# Altium PCB AIRZAI_LED_STRIP_FLEX_REVA_7p5Pitch.PcbDoc
Units mil, origin at the board's own origin, x right, y up, seen from the top; angles counter-clockwise.
Board outline 6727.47 x 711.99 mil, 2 copper layers (Top Layer, Bottom Layer); 45 components, 44 nets, 220 pads, 46 vias.
Unrouted connection lines stored in the file: 63.
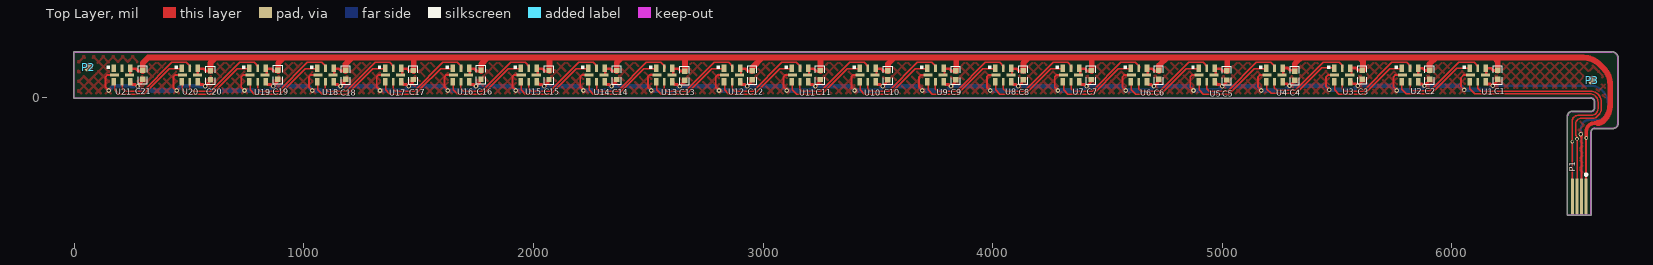
[diagram p0: Top Layer view]
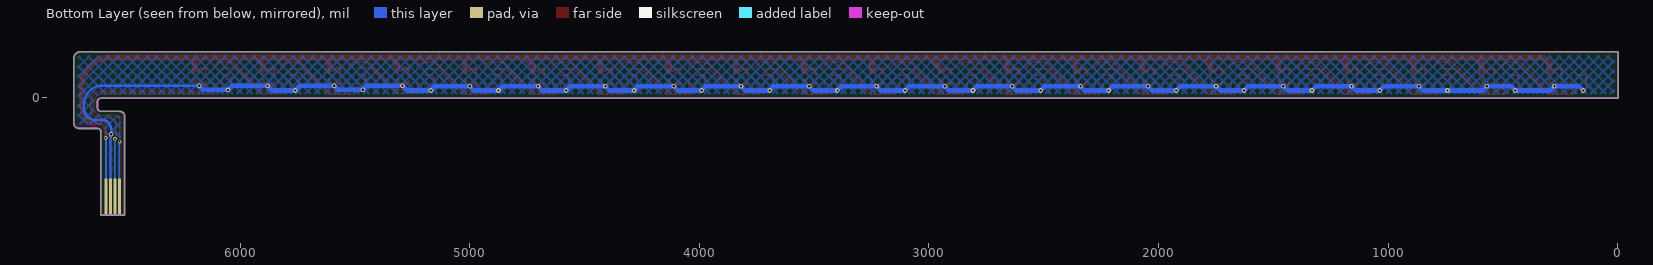
[diagram p1: Bottom Layer view, seen from below]

## Layer stack, top to bottom
Top Solder: solder mask 0.4, Solder Resist, Dk 3.5
Top Layer: signal copper 1.4
Dielectric 1: dielectric 12.6, FR-4, Dk 4.8
Bottom Layer: signal copper 1.4
Bottom Solder: solder mask 0.4, Solder Resist, Dk 3.5

## Board outline
6503.5,-510.11 ccw(c6506.02,-510.11) 6506.02,-512.63 6604.44,-512.63 ccw(c6604.44,-510.11) 6606.96,-510.11 6606.96,-152 ccw(c6604.44,-152) 6606.95,-151.79 cw(c6622.38,-150.62) 6621.1,-135.2 6702.76,-135.2 ccw(c6702.76,-113) 6724.96,-113 ccw(c6722.44,-113) 6723.97,-111 ccw(c6722.44,-109) 6724.96,-109 6724.96,171.81 ccw(c6697.4,171.81) 6697.4,199.37 0,199.37 ccw(c0,196.85) -2.52,196.85 -2.52,0 ccw(c0,0) 0,-2.52 6604.33,-2.51 ccw(c6604.33,0) 6604.33,-2.51 cw(c6604.33,-19.68) 6621.5,-19.68 6621.5,-43 cw(c6604.33,-43) 6604.33,-60.17 6524.02,-60.17 cw(c6523.67,-80.34) 6524.05,-60.17 6524.02,-60.17 ccw(c6523.67,-80.34) 6503.5,-79.95 ccw(c6506.02,-80) 6503.5,-80
board region "Layer Stack Region 1": 6606.95,-294 6606.96,-510.11 6606.96,-510.61 6606.57,-511.54 6605.87,-512.24 6604.94,-512.63 6604.44,-512.63 6506.02,-512.63 6505.52,-512.63 6504.59,-512.24 6503.88,-511.54 6503.5,-510.61 6503.5,-510.11 6503.5,-294
board region "Layer Stack Region 1": 6368,199.37 6697.4,199.37 6700.12,199.37 6705.44,198.31 6710.45,196.23 6714.97,193.21 6718.8,189.38 6721.82,184.86 6723.9,179.85 6724.96,174.52 6724.96,171.81 6724.96,-109 6724.82,-109.86 6724.57,-110.38 6723.97,-111 6724.57,-111.62 6724.82,-112.14 6724.96,-112.71 6724.96,-117.42 6721.58,-125.58 6715.33,-131.82 6707.17,-135.2 6702.76,-135.2 6621.1,-135.2 6618.13,-135.74 6612.78,-138.48 6608.88,-143.06 6607.01,-148.77 6606.95,-151.79 6606.95,-230 6503.5,-230.01 6503.5,-80 6503.58,-75.95 6506.78,-68.6 6512.55,-63.03 6520.01,-60.1 6524.02,-60.17 6604.33,-60.17 6607.68,-59.84 6613.87,-57.28 6618.61,-52.54 6621.17,-46.35 6621.5,-43 6621.5,-19.69 6621.17,-16.34 6618.61,-10.15 6613.87,-5.41 6607.68,-2.85 6604.33,-2.52 6368,-2.52
board region "Layer Stack Region 1": 6503.5,-294 6503.5,-230.01 6606.95,-230 6606.95,-294
board region "Layer Stack Region 1": 6289,-2.52 0,-2.52 -0.5,-2.52 -1.42,-2.13 -2.13,-1.43 -2.52,-0.5 -2.52,0 -2.52,196.85 -2.52,197.35 -2.13,198.28 -1.42,198.98 -0.5,199.37 0,199.37 6289,199.37
board region "Layer Stack Region 3": 6368,-2.52 6289,-2.52 6289,199.37 6368,199.37

## Design rules (kind name [scope] priority, off if disabled: settings)
Clearance Clearance_Fudicial [HasFootprint('Fudicial') vs (InNet('GND') AND InPolygon)] p1: gap=19.68 ignorepadtopadclearanceinfootprint=FALSE
Clearance Clearance_polygon_5V [OnLayer('Keep-Out Layer') vs (InNet('+5V') AND InPolygon)] p2: gap=10 ignorepadtopadclearanceinfootprint=FALSE
Clearance Clearance_POLYGON_KEEPOUT [(OnLayer('Keep-Out Layer')) vs (InNet('GND') AND InPolygon)] p3: gap=10 ignorepadtopadclearanceinfootprint=FALSE
Clearance [All] p4: gap=6 ignorepadtopadclearanceinfootprint=FALSE
MinimumSolderMaskSliver [All] p1: minsoldermaskwidth=1
PolygonConnect [All] p1: connectstyle=Direct reliefconductorwidth=10 reliefentries=4 polygonreliefangle="90 Angle" airgapwidth=10
RoomDefinition AIRZAI_LED_STRIP_FLEX_REVA_7p5Pitch [InComponentClass('AIRZAI_LED_STRIP_FLEX_REVA_7p5Pitch')] p1: confinementstyle=ConfineIn formatcopy=TRUE lockcomponents=FALSE outline -3699.89,-5126.44 10960.11,-5126.44 10960.11,4473.56 -3699.89,4473.56
RoutingVias [All] p1: holewidth=28 width=50 viastyle="Through Hole" minholewidth=8 minwidth=16 maxholewidth=28 maxwidth=50
SilkToSilkClearance [All] p1: silktosilkclearance=1
SilkToSolderMaskClearance [IsPad] p1: minsilkscreentomaskgap=2 clearancetoexposedcopper=TRUE
SolderMaskExpansion [All] p1: expansion=4
UnRoutedNet [All] p1: checkbadconnections=TRUE
Width [All] p1: maxlimit=100 minlimit=6 preferedwidth=10
26 further rules are at their usual default settings.

## Components (designator, comment, footprint, x,y, rotation, side; value= is the part's Value field where it differs from the comment)
C1 "0.1µF" 0402CAP 6200.25,98.43 r270 top
C2 "0.1µF" 0402CAP 5903.14,98.43 r270 top
C3 "0.1µF" 0402CAP 5609.7,99.11 r270 top
C4 "0.1µF" 0402CAP 5315.92,95.43 r270 top
C5 "0.1µF" 0402CAP 5020.25,96.11 r270 top
C6 "0.1µF" 0402CAP 4723.87,98.43 r270 top
C7 "0.1µF" 0402CAP 4428.6,98.11 r270 top
C8 "0.1µF" 0402CAP 4133.32,97.46 r270 top
C9 "0.1µF" 0402CAP 3839.05,96.93 r270 top
C10 "0.1µF" 0402CAP 3543.77,97.11 r270 top
C11 "0.1µF" 0402CAP 3248.17,98.11 r270 top
C12 "0.1µF" 0402CAP 2953.22,97.61 r270 top
C13 "0.1µF" 0402CAP 2657.94,95.42 r270 top
C14 "0.1µF" 0402CAP 2362.1,98.11 r270 top
C15 "0.1µF" 0402CAP 2067.39,98.11 r270 top
C16 "0.1µF" 0402CAP 1771.49,99.64 r270 top
C17 "0.1µF" 0402CAP 1476.84,98.11 r270 top
C18 "0.1µF" 0402CAP 1181.57,98.64 r270 top
C19 "0.1µF" 0402CAP 886.73,99.58 r270 top
C20 "0.1µF" 0402CAP 593.02,97.11 r270 top
C21 "0.1µF" 0402CAP 298.06,99.43 r270 top
P1 "Header 4" FFC_4PADS 6555.23,-431.39 r0 top
P2 "" Fudicial 62,132 r0 top locked value="Fudicial Mark"
P3 "" Fudicial 6612.56,75.74 r0 top value="Fudicial Mark"
U1 "APA102-2020-256-8" APA102–2020 6113.25,98.43 r270 top
U2 "APA102-2020-256-8" APA102–2020 5817.98,98.43 r270 top
U3 "APA102-2020-256-8" APA102–2020 5522.7,98.43 r270 top
U4 "APA102-2020-256-8" APA102–2020 5227.43,98.43 r270 top
U5 "APA102-2020-256-8" APA102–2020 4932.25,98.43 r270 top
U6 "APA102-2020-256-8" APA102–2020 4636.87,98.43 r270 top
U7 "APA102-2020-256-8" APA102–2020 4341.6,98.43 r270 top
U8 "APA102-2020-256-8" APA102–2020 4046.32,98.43 r270 top
U9 "APA102-2020-256-8" APA102–2020 3751.05,98.43 r270 top
U10 "APA102-2020-256-8" APA102–2020 3455.77,98.43 r270 top
U11 "APA102-2020-256-8" APA102–2020 3160.5,98.43 r270 top
U12 "APA102-2020-256-8" APA102–2020 2865.22,98.43 r270 top
U13 "APA102-2020-256-8" APA102–2020 2569.94,98.43 r270 top
U14 "APA102-2020-256-8" APA102–2020 2274.67,98.43 r270 top
U15 "APA102-2020-256-8" APA102–2020 1979.39,98.43 r270 top
U16 "APA102-2020-256-8" APA102–2020 1684.12,98.43 r270 top
U17 "APA102-2020-256-8" APA102–2020 1388.84,98.43 r270 top
U18 "APA102-2020-256-8" APA102–2020 1093.57,98.43 r270 top
U19 "APA102-2020-256-8" APA102–2020 798.29,98.43 r270 top
U20 "APA102-2020-256-8" APA102–2020 503.02,98.43 r270 top
U21 "APA102-2020-256-8" APA102–2020 207.74,98.43 r270 top

## Footprints (in the part's own frame and the unit in brackets; to place one, negate y for a bottom-side part, rotate by r counter-clockwise, add the part's x,y. Pads: shape width x height; smd on the part's side, far side on the other; paste and mask are expansions set on the pad)
0402CAP [mm] "Chip Capacitor, Body 1.1x0.5mm, IPC High Density"
  rect 0.6x0.6 smd: 1(-0.5,0) 2(0.5,0)
  silkscreen extent -1.02,-0.51 1.02,0.51, body extent -0.5,-0.3 0.5,0.3, height 0.19
APA102–2020 [mm]
  rect 0.8x0.5 smd: 1(-0.75,0.9) 3(-0.75,-0.9) 4(0.75,-0.9) 6(0.75,0.9)
  rect 0.8x0.3 smd: 2(-0.75,0) 5(0.75,0)
  rect 0.3x1 smd: 7(0,-0.83) 8(0,0.83)
  silkscreen extent -1.02,-1.7 -0.63,-1.32, body extent -1,-1 1,1, height 0.94
FFC_4PADS [mm] "(0.50mm"
  rect 0.3x4 smd: 1(0.75,0) 2(0.25,0) 3(-0.25,0) 4(-0.75,0)
  rect 0.3x4 smd far side: 1(0.75,0) 2(0.25,0) 3(-0.25,0) 4(-0.75,0)
  silkscreen extent 0.64,2.31 0.89,2.56
Fudicial [mm]
  round 1 smd paste-0.5 mask+0.5: 1(0,0)

## Part data
C1 C2 C3 C4 C5 C6 C7 C8 C9 C10 C11 C12 C13 C14 C15 C16 C17 C18 C19 C20 C21: library part C0402-100n, "Capacitor, X7R, ±10%", Case-EIA=0402, Case-Metric=1005, Manufacturer=TDK, Manufacturer Part Number=C1005X7R1C104K, Rated Voltage="16 V", Supplier Part Number 1=445-4952-2-ND, Tolerance=±20%, Max Thickness="0.6 mm", Note="16V ±10% X7R", Pin Count=2, Supplier 1=Digi-Key, Technology=SMT
P1: "Header, 4-Pin", LatestRevisionDate=17-Jul-2002, LatestRevisionNote="Re-released for DXP Platform.", Publisher="Altium Limited"
P2 P3: library part TP
U1 U2 U3 U4 U5 U6 U7 U8 U9 U10 U11 U12 U13 U14 U15 U16 U17 U18 U19 U20 U21: "DotStar Micro LEDs", Package="SOIC-20 Adafruit Industries", Availability=Unavailable, MF="Adafruit Industries", MP=APA-102-2020-256-8, Price=None, SnapEDA_Link=https://www.snapeda.com/parts/APA-102-2020-256-8/APA%20Electronic%20/view-part/?ref=snap

## Via types
v1: diameter 20, hole 10, Top Layer to Bottom Layer, tented both sides, 43 vias
v2: diameter 16, hole 8, Top Layer to Bottom Layer, tented both sides, 3 vias

## Nets (pads, with @x,y where several pads share a name; then routed paths per layer and width w, separated by ;. In a path a pad name is that pad's centre, name@x,y a point inside that pad or via, vN(x,y) a via of type N, cw(c..) or ccw(c..) an arc to the next point about the centre after c; other vN are vias at no path point)
+5V: C1.1 C2.1 C3.1 C4.1 C5.1 C6.1 C7.1 C8.1 C9.1 C10.1 C11.1 C12.1 C13.1 C14.1 C15.1 C16.1 C17.1 C18.1 C19.1 C20.1 C21.1 P1.1 U1.1 U1.8 U2.1 U2.8 U3.1 U3.8 U4.1 U4.8 U5.1 U5.8 U6.1 U6.8 U7.1 U7.8 U8.1 U8.8 U9.1 U9.8 U10.1 U10.8 U11.1 U11.8 U12.1 U12.8 U13.1 U13.8 U14.1 U14.8 U15.1 U15.8 U16.1 U16.8 U17.1 U17.8 U18.1 U18.8 U19.1 U19.8 U20.1 U20.8 U21.1 U21.8 | length 10913.6
  Top Layer w10: U21.8@242.92,97.69 U21.1@242.92,123.33 ; U20.8@537.92,100 U20.1@537.92,125.64 ; U19.8@837.65,100 U19.1@837.65,125.64 ; U18.8@1131.84,98.42 U18.1@1131.84,125.64 ; U17.8@1428.2,100 U17.1@1428.2,125.64 ; U16.8@1722.3,98.42 U16.1@1722.3,125.64 ; U15.8@2018.75,100 U15.1@2018.75,125.64 ; U14.8@2312.89,98.43 U14.1@2312.89,125.64 ; U13.8@2609.3,100 U13.1@2609.3,125.64 ; U12.8@2903.5,98.43 U12.1@2903.5,125.64 ; U11.8@3199.85,100 U11.1@3199.85,125.64 ; U10.8@3494.05,98.43 U10.1@3494.05,125.64 ; U9.8@3790.4,100 U9.1@3790.4,125.64 ; U8.8@4084.6,98.43 U8.1@4084.6,125.64 ; U7.8@4380.95,100 U7.1@4380.95,125.64 ; U6.8@4675.15,98.43 U6.1@4675.15,125.64 ; U5.8@4971.61,100 U5.1@4971.61,125.64 ; U4.8@5262.95,99.12 5264.8,99.12 5265.7,100.02 U4.1@5265.7,128.64 ; U3.8@5562.06,99.12 5562.96,100.02 U3.1@5562.96,128.64 ; U2.8 5852.5,98.43 5853.41,99.33 U2.1 ; U1.8@6149.61,98.43 6150.52,99.33 U1.1@6150.52,127.95 ; P1.1@6584.76,-399.39 6584.76,-181.5 6584.87,-181.39 6584.87,-177.15 v2(6586.02,-176)
  Top Layer w12: U21.1@247.1,125.65 267.65,125.65 277.49,115.8 C21.1@297.74,115.8 ; U20.1@542.37,125.64 562.92,125.64 572.77,115.8 C20.1@593.01,115.8 ; U19.1@837.65,125.64 858.2,125.64 868.04,115.8 C19.1@888.29,115.8 ; U18.1@1131.84,125.64 1151.49,125.64 1161.33,115.8 C18.1@1181.58,115.8 ; U17.1@1428.2,125.64 1448.75,125.64 1458.59,115.8 C17.1@1478.84,115.8 ; U16.1@1722.3,125.64 1741.95,125.64 1751.79,115.8 C16.1@1772.03,115.8 ; U15.1@2018.75,125.64 2039.3,125.64 2049.14,115.8 C15.1@2069.39,115.8 ; U14.1@2312.89,125.64 2332.54,125.64 2342.38,115.8 C14.1@2362.62,115.8 ; U13.1@2609.3,125.64 2629.85,125.64 2639.69,115.8 C13.1@2659.94,115.8 ; U12.1@2903.5,125.64 2923.14,125.64 2932.99,115.8 C12.1@2953.23,115.8 ; U11.1@3199.85,125.64 3220.4,125.64 3230.25,115.8 C11.1@3250.49,115.8 ; U10.1@3494.05,125.64 3513.7,125.64 3523.54,115.8 C10.1@3543.78,115.8 ; U9.1@3790.4,125.64 3810.95,125.64 3820.8,115.8 C9.1@3841.04,115.8 ; U8.1@4084.6,125.64 4104.25,125.64 4114.09,115.8 C8.1@4134.33,115.8 ; U7.1@4380.95,125.64 4401.51,125.64 4411.35,115.8 C7.1@4431.59,115.8 ; U6.1@4675.15,125.64 4694.8,125.64 4704.64,115.8 C6.1@4724.88,115.8 ; U5.1@4971.61,125.64 4992.16,125.64 5002,115.8 C5.1@5022.25,115.8 ; U4.1@5265.7,128.64 5285.35,128.64 5295.19,118.8 C4.1@5315.43,118.8 ; U3.1@5562.96,128.64 5582.61,128.64 5592.45,118.8 C3.1@5612.69,118.8 ; U2.1 5873.06,127.95 5882.9,118.11 C2.1 ; U1.1@6150.52,127.95 6170.17,127.95 6180.01,118.11 C1.1
  Top Layer w16: v2(6586.02,-176) 6586.02,-146.1 cw(c6620.1,-146.1) 6596,-122 cw(c6622.52,-148.52) 6622.52,-111.01 6635.58,-111.01
  Top Layer w25: C21.1@297.74,115.8 297.74,150 297.81,150 322.02,174.2 617.29,174.2 ; C20.1@593.01,115.8 593.01,150 593.09,150 617.29,174.2 ; C19.1@888.29,115.8 888.29,150 888.36,150 912.56,174.2 ; C18.1@1181.58,115.8 1181.58,144.79 1210.99,174.2 ; 1473.01,174.2 1478.84,168.38 C17.1@1478.84,115.8 ; C16.1@1772.03,115.8 1772.03,145.1 1801.13,174.2 ; 1899.65,174.2 2063.96,174.2 2069.39,168.77 C15.1@2069.39,115.8 ; C14.1@2362.62,115.8 2362.62,152.19 2384.63,174.2 2437.43,174.2 ; 2535.91,174.2 2657.71,174.2 2659.94,171.97 C13.1@2659.94,115.8 ; C12.1@2953.23,115.8 2953.23,129.99 2997.44,174.2 ; 3095.86,174.2 3243.29,174.2 ; C11.1@3250.49,115.8 3250.49,167 3243.29,174.2 ; 3250.49,174.2 3243.29,174.2 ; C10.1@3543.78,115.8 3543.78,146.17 3571.82,174.2 ; C9.1@3841.04,115.8 3841.04,174.2 ; C8.1@4134.33,115.8 4134.33,150.29 4158.24,174.2 ; C7.1@4431.59,115.8 4431.59,168.87 4426.26,174.2 ; C6.1@4724.88,115.8 4724.88,138.99 4760.09,174.2 ; C5.1@5022.25,115.8 5022.25,174.2 ; C4.1@5315.43,118.8 5315.43,145.77 5339.31,169.64 ; 5596.95,174.2 5612.69,158.45 C3.1@5612.69,118.8 ; C2.1 5903.14,146.22 5930.33,173.41 5929.54,174.2 ; C1.1 6200.25,157.76 6183.81,174.2 ; 6635.58,-111.01 ccw(c6635.58,-75.07) 6661,-100.49 ccw(c6590.99,-30.47) 6690,-30.47 6690,56.58 ccw(c6590,56.58) 6660.71,127.29 6643.09,144.91 ccw(c6572.38,74.2) 6572.38,174.2 6183.81,174.2 ; 617.29,174.2 912.56,174.2 ; 912.56,174.2 5022.25,174.2 ; 4426.26,174.2 4344.59,174.2 4426.26,174.2 ; 5022.25,174.2 6183.81,174.2
  Bottom Layer w10: P1.1@6584.76,-399.39 6584.76,-181.5 6584.87,-181.39 6584.87,-177.37 6584.76,-177.26 v2(6586.02,-176)
GND: C1.2 C2.2 C3.2 C4.2 C5.2 C6.2 C7.2 C8.2 C9.2 C10.2 C11.2 C12.2 C13.2 C14.2 C15.2 C16.2 C17.2 C18.2 C19.2 C20.2 C21.2 P1.2 U1.6 U1.7 U2.6 U2.7 U3.6 U3.7 U4.6 U4.7 U5.6 U5.7 U6.6 U6.7 U7.6 U7.7 U8.6 U8.7 U9.6 U9.7 U10.6 U10.7 U11.6 U11.7 U12.6 U12.7 U13.6 U13.7 U14.6 U14.7 U15.6 U15.7 U16.6 U16.7 U17.6 U17.7 U18.6 U18.7 U19.6 U19.7 U20.6 U20.7 U21.6 U21.7 | length 11410.5
  Top Layer w8: v1(150.5,30.69) 136.43,44.76 136.43,90.55 144.31,98.43 U21.7 ; v1(445.78,30.69) 431.7,44.76 431.7,90.55 439.58,98.43 U20.7 ; v1(741.05,30.69) 726.98,44.76 726.98,90.54 734.86,98.43 U19.7 ; v1(1036.32,30.69) 1022.25,44.76 1022.25,90.54 1030.13,98.43 U18.7 ; v1(1331.6,30.69) 1317.53,44.76 1317.53,90.54 1325.41,98.43 U17.7 ; v1(1626.88,30.69) 1612.8,44.76 1612.8,90.54 1620.68,98.43 U16.7 ; v1(1922.15,30.69) 1908.08,44.76 1908.08,90.54 1915.96,98.43 U15.7 ; v1(2217.43,30.69) 2203.35,44.76 2203.35,90.54 2211.24,98.43 U14.7 ; v1(2512.7,30.69) 2498.63,44.76 2498.63,90.54 2506.51,98.43 U13.7 ; v1(2807.98,30.69) 2793.91,44.76 2793.91,90.54 2801.79,98.43 U12.7 ; v1(3103.25,30.69) 3089.18,44.76 3089.18,90.54 3097.06,98.43 U11.7 ; v1(3398.53,30.69) 3384.46,44.76 3384.46,90.54 3392.34,98.43 U10.7 ; v1(3693.8,30.69) 3679.73,44.76 3679.73,90.54 3687.61,98.43 U9.7 ; v1(3989.08,30.69) 3975.01,44.76 3975.01,90.54 3982.89,98.43 U8.7 ; v1(4284.36,30.69) 4270.28,44.76 4270.28,90.54 4278.17,98.43 U7.7 ; v1(4579.63,30.69) 4565.56,44.76 4565.56,90.54 4573.44,98.43 U6.7 ; v1(4875.01,30.69) 4860.94,44.76 4860.94,90.54 4868.82,98.43 U5.7 ; v1(5170.18,30.69) 5156.11,44.76 5156.11,90.54 5163.99,98.43 U4.7 ; v1(5466.46,33.69) 5452.39,47.76 5452.39,89.56 5461.25,98.43 U3.7@5488.02,98.43 ; v1(5760.73,30.69) 5746.66,44.76 5746.66,90.54 5754.54,98.43 U2.7 ; v1(6054.02,33) 6039.94,47.07 6039.94,86.12 6052.25,98.43 U1.7@6076.27,98.43
  Top Layer w10: v1@6563.93,-161.91 v1(6562.02,-160) 6562.02,-170 6565.07,-173.05 P1.2@6565.07,-399.39
  Top Layer w12: U21.6@248,66.59 248,60.68 251.85,56.84 265.02,56.84 273.17,48.69 v1(275.34,48.69) 298.06,71.42 C21.2 ; U20.6@543.28,66.59 543.28,60.68 547.12,56.84 560.3,56.84 568.45,48.69 v1(570.61,48.69) 587.2,65.28 587.2,70.62 C20.2@593.01,76.43 ; U19.6@838.55,66.59 838.55,60.68 842.4,56.84 855.57,56.84 863.72,48.69 v1(865.88,48.69) 882.47,65.28 882.47,70.62 C19.2@888.29,76.43 ; U18.6@1131.84,66.59 1131.84,60.68 1135.69,56.84 1148.86,56.84 1157.01,48.69 v1(1159.17,48.69) 1175.76,65.28 1175.76,70.62 C18.2@1181.58,76.43 ; U17.6@1429.1,66.59 1429.1,60.68 1432.95,56.84 1446.12,56.84 1454.27,48.69 v1(1456.43,48.69) 1473.02,65.28 1473.02,70.62 C17.2@1478.84,76.43 ; U16.6@1722.3,66.59 1722.3,60.68 1726.14,56.84 1739.32,56.84 1747.47,48.69 v1(1749.63,48.69) 1766.22,65.28 1766.22,70.62 C16.2@1772.03,76.43 ; U15.6@2019.65,66.59 2019.65,60.68 2023.5,56.84 2036.67,56.84 2044.82,48.69 v1(2046.99,48.69) 2063.58,65.28 2063.58,70.62 C15.2@2069.39,76.43 ; U14.6@2312.89,66.59 2312.89,60.68 2316.73,56.84 2329.91,56.84 2338.06,48.69 v1(2340.22,48.69) 2356.81,65.28 2356.81,70.62 C14.2@2362.62,76.43 ; U13.6@2610.21,66.59 2610.21,60.68 2614.05,56.84 2627.22,56.84 2635.37,48.69 v1(2637.54,48.69) 2654.13,65.28 2654.13,70.62 C13.2@2659.94,76.43 ; U12.6@2903.5,66.59 2903.5,60.68 2907.34,56.84 2920.51,56.84 2928.66,48.69 v1(2930.83,48.69) 2947.42,65.28 2947.42,70.62 C12.2@2953.23,76.43 ; U11.6@3200.76,66.59 3200.76,60.68 3204.6,56.84 3217.77,56.84 3225.92,48.69 v1(3228.09,48.69) 3244.68,65.28 3244.68,70.62 C11.2@3250.49,76.43 ; U10.6@3494.05,66.59 3494.05,60.68 3497.89,56.84 3511.07,56.84 3519.22,48.69 v1(3521.38,48.69) 3537.97,65.28 3537.97,70.62 C10.2@3543.78,76.43 ; U9.6@3791.31,66.59 3791.31,60.68 3795.15,56.84 3808.32,56.84 3816.47,48.69 v1(3818.64,48.69) 3835.23,65.28 3835.23,70.62 C9.2@3841.04,76.43 ; U8.6@4084.6,66.59 4084.6,60.68 4088.44,56.84 4101.62,56.84 4109.77,48.69 v1(4111.93,48.69) 4128.52,65.28 4128.52,70.62 C8.2@4134.33,76.43 ; U7.6@4381.86,66.59 4381.86,60.68 4385.7,56.84 4398.88,56.84 4407.03,48.69 v1(4409.19,48.69) 4425.78,65.28 4425.78,70.62 C7.2@4431.59,76.43 ; U6.6@4675.15,66.59 4675.15,60.68 4678.99,56.84 4692.17,56.84 4700.32,48.69 v1(4702.48,48.69) 4719.07,65.28 4719.07,70.62 C6.2@4724.88,76.43 ; U5.6@4972.51,66.59 4972.51,60.68 4976.36,56.84 4989.53,56.84 4997.68,48.69 v1(4999.85,48.69) 5016.44,65.28 5016.44,70.62 C5.2@5022.25,76.43 ; U4.6@5265.7,69.59 5265.7,63.68 5269.54,59.84 5282.72,59.84 5290.87,51.69 v1(5293.03,51.69) 5309.62,68.28 5309.62,73.62 C4.2@5315.43,79.43 ; U3.6@5562.96,69.59 5562.96,63.68 5566.8,59.84 5579.98,59.84 5588.13,51.69 v1(5590.29,51.69) 5606.88,68.28 5606.88,73.62 C3.2@5612.69,79.43 ; U2.6 5853.41,62.99 5857.25,59.15 5870.43,59.15 5878.58,51 v1(5880.74,51) 5897.33,67.59 5897.33,72.93 C2.2 ; U1.6@6150.52,68.9 6150.52,62.99 6154.36,59.15 6167.54,59.15 6175.69,51 v1(6177.85,51) 6194.44,67.59 6194.44,72.93 C1.2
  Bottom Layer w10: v1(6177.85,51) 6606.22,51 cw(c6606.22,-18.34) 6655.25,30.69 cw(c6595.47,-29.09) 6680.02,-29.09 6680.02,-51.25 cw(c6633.71,-51.25) 6666.45,-84 cw(c6632.65,-50.2) 6632.65,-98 6596.73,-98 ccw(c6596.73,-128.73) 6575,-107 ccw(c6606.35,-138.35) 6562.02,-138.35 v1(6562.02,-160) cw(c6554.64,-167.37) 6565.07,-167.37 P1.2@6565.07,-399.39
  Bottom Layer w20: v1(150.5,30.69) 168.5,48.69 v1(275.34,48.69) 293.34,30.69 v1(445.78,30.69) 463.78,48.69 v1(570.61,48.69) 588.61,30.69 v1(741.05,30.69) 847.88,30.69 v1(865.88,48.69) 1018.32,48.69 v1(1036.32,30.69) 1141.17,30.69 v1(1159.17,48.69) 1313.6,48.69 v1(1331.6,30.69) 1438.43,30.69 v1(1456.43,48.69) 1608.88,48.69 v1(1626.88,30.69) 1731.63,30.69 v1(1749.63,48.69) 1904.15,48.69 v1(1922.15,30.69) 2028.99,30.69 v1(2046.99,48.69) 2199.43,48.69 v1(2217.43,30.69) 2322.22,30.69 v1(2340.22,48.69) 2494.7,48.69 v1(2512.7,30.69) 2619.54,30.69 v1(2637.54,48.69) 2789.98,48.69 v1(2807.98,30.69) 2912.83,30.69 v1(2930.83,48.69) 3085.25,48.69 v1(3103.25,30.69) 3210.09,30.69 v1(3228.09,48.69) 3380.53,48.69 v1(3398.53,30.69) 3503.38,30.69 v1(3521.38,48.69) 3675.8,48.69 v1(3693.8,30.69) 3800.64,30.69 v1(3818.64,48.69) 3971.08,48.69 v1(3989.08,30.69) 4093.93,30.69 v1(4111.93,48.69) 4266.36,48.69 v1(4284.36,30.69) 4391.19,30.69 v1(4409.19,48.69) 4561.63,48.69 v1(4579.63,30.69) 4684.48,30.69 v1(4702.48,48.69) 4857.01,48.69 v1(4875.01,30.69) 4981.85,30.69 v1(4999.85,48.69) 5152.18,48.69 v1(5170.18,30.69) 5272.03,30.69 v1(5293.03,51.69) 5448.46,51.69 v1(5466.46,33.69) 5572.29,33.69 v1(5590.29,51.69) 5739.73,51.69 v1(5760.73,30.69) 5860.43,30.69 v1(5880.74,51) 6036.02,51 v1(6054.02,33) 6159.85,33 v1(6177.85,51)
LED_CLK_IN: P1.3 U1.5 | length 1282.9
  Top Layer w6: U1.5 6113.25,40.76 6126.02,28 6603.2,28 cw(c6603.2,-19.8) 6637,14 cw(c6603.2,-19.8) 6651,-19.8 6651,-49.44 cw(c6613.44,-49.44) 6640,-76 6635.61,-80.39 cw(c6610,-54.79) 6610,-91 6562.29,-91 ccw(c6562.29,-114.9) 6545.39,-98 ccw(c6560.76,-113.38) 6539.02,-113.38 6539.02,-158.34 ccw(c6552.67,-158.34) 6543.02,-168 cw(c6537.29,-173.72) 6545.39,-173.72 6545.39,-180 v2(6545.27,-180.12) v2(6545.27,-180.12) P1.3@6545.33,-399.33
  Bottom Layer w6: v2(6545.27,-180.12) 6545.39,-180.24 P1.3@6545.39,-399.39
LED_CLK_OUT1: U1.2 U2.5 | length 395.6
  Top Layer w6: U2.5 5817.98,38.15 5826.13,30 5906.74,30 6029.44,152.7 6097.31,152.7 6113.25,136.76 U1.2
LED_CLK_OUT2: U2.2 U3.5 | length 399
  Top Layer w6: U3.5@5522.55,68.9 5522.55,38.68 5533.54,27.69 5614.16,27.69 5739.17,152.7 5802.72,152.7 5820.97,134.45 U2.2@5820.97,127.95
LED_CLK_OUT3: U3.2 U4.5 | length 395.7
  Top Layer w6: U4.5 5227.43,41.68 5238.42,30.69 5319.03,30.69 5441.04,152.7 5510.45,152.7 5525.69,137.45 U3.2@5525.69,128.64
LED_CLK_OUT4: U4.2 U5.5 | length 398.8
  Top Layer w6: U5.5 4932.25,38.68 4943.25,27.69 5023.86,27.69 5148.87,152.7 5212.17,152.7 5230.42,134.45 U4.2@5230.42,127.95
LED_CLK_OUT5: U5.2 U6.5 | length 399
  Top Layer w6: U6.5 4636.87,38.68 4647.87,27.69 4728.48,27.69 4853.49,152.7 4917,152.7 4935.25,134.46 U5.2@4935.25,127.95
LED_CLK_OUT6: U6.2 U7.5 | length 398.9
  Top Layer w6: U7.5 4341.6,38.68 4352.59,27.69 4433.21,27.69 4558.22,152.7 4621.62,152.7 4639.87,134.45 U6.2@4639.87,127.95
LED_CLK_OUT7: U7.2 U8.5 | length 398.9
  Top Layer w6: U8.5 4046.32,38.68 4057.32,27.69 4137.93,27.69 4262.94,152.7 4326.35,152.7 4344.59,134.45 U7.2@4344.59,127.95
LED_CLK_OUT8: U8.2 U9.5 | length 398.9
  Top Layer w6: U9.5 3751.05,38.68 3762.04,27.69 3842.65,27.69 3967.67,152.7 4031.07,152.7 4049.32,134.45 U8.2@4049.32,127.95
LED_CLK_OUT9: U9.2 U10.5 | length 398.9
  Top Layer w6: U10.5 3455.77,38.68 3466.77,27.69 3547.38,27.69 3672.39,152.7 3735.79,152.7 3754.04,134.45 U9.2@3754.04,127.95
LED_CLK_OUT10: U10.2 U11.5 | length 398.9
  Top Layer w6: U11.5 3160.5,38.68 3171.49,27.69 3252.1,27.69 3377.12,152.7 3440.52,152.7 3458.77,134.45 U10.2@3458.77,127.95
LED_CLK_OUT11: U11.2 U12.5 | length 398.9
  Top Layer w6: U12.5 2865.22,38.68 2876.21,27.69 2956.83,27.69 3081.84,152.7 3145.24,152.7 3163.49,134.45 U11.2@3163.49,127.95
LED_CLK_OUT12: U12.2 U13.5 | length 398.9
  Top Layer w6: U13.5 2569.94,38.68 2580.94,27.69 2661.55,27.69 2786.56,152.7 2849.97,152.7 2868.21,134.45 U12.2@2868.21,127.95
LED_CLK_OUT13: U13.2 U14.5 | length 398.9
  Top Layer w6: U14.5@2274.61,68.9 2274.61,38.68 2285.61,27.69 2366.22,27.69 2491.23,152.7 2554.69,152.7 2572.94,134.45 U13.2@2572.94,127.95
LED_CLK_OUT14: U14.2 U15.5 | length 398.7
  Top Layer w6: U15.5@1979.54,68.9 1979.54,38.69 1990.54,27.69 2071.15,27.69 2196.16,152.7 2259.42,152.7 2277.66,134.45 U14.2@2277.66,127.95
LED_CLK_OUT15: U15.2 U16.5 | length 399
  Top Layer w6: U16.5@1684.02,68.9 1684.02,38.68 1695.02,27.69 1775.63,27.69 1900.64,152.7 1964.14,152.7 1982.39,134.45 U15.2@1982.39,127.95
LED_CLK_OUT16: U16.2 U17.5 | length 398.9
  Top Layer w6: U17.5 1388.84,38.69 1399.84,27.69 1480.45,27.69 1605.46,152.7 1668.86,152.7 1687.11,134.45 U16.2@1687.11,127.95
LED_CLK_OUT17: U17.2 U18.5 | length 398.9
  Top Layer w6: U18.5 1093.57,38.68 1104.56,27.69 1185.17,27.69 1310.19,152.7 1373.59,152.7 1391.84,134.45 U17.2@1391.84,127.95
LED_CLK_OUT18: U18.2 U19.5 | length 398.9
  Top Layer w6: U19.5 798.29,38.69 809.29,27.69 889.9,27.69 1014.91,152.7 1078.31,152.7 1096.56,134.45 U18.2@1096.56,127.95
LED_CLK_OUT19: U19.2 U20.5 | length 392.4
  Top Layer w6: U20.5 503.02,38.69 514.01,27.69 594.63,27.69 719.64,152.7 783.04,152.7 U19.2@801.29,134.46
LED_CLK_OUT20: U20.2 U21.5 | length 392.4
  Top Layer w6: U21.5 207.74,38.69 218.74,27.69 299.35,27.69 424.36,152.7 487.76,152.7 U20.2@506.01,134.46
LED_SDI: P1.4 U1.4 | length 1295
  Top Layer w6: U1.4 6077.82,37.2 6099.02,16 6602,16 cw(c6602,-17.8) 6625.9,6.1 6626,6 cw(c6599.44,-20.56) 6637,-20.56 6637,-48.69 cw(c6609.69,-48.69) 6629.01,-67.99 6627.07,-69.93 cw(c6610,-52.86) 6610,-77 6552.73,-77 ccw(c6552.73,-107.73) 6531,-86 ccw(c6545.49,-100.49) 6525,-100.49 v2(6525,-192) ; P1.4@6525.7,-399.39 v2@6525.7,-193.02
  Bottom Layer w6: v2(6525,-192) 6526.02,-193.02 P1.4@6526.02,-399.07
LED_SDO_1: U1.3 U2.4 | length 382.5
  Top Layer w6: U2.4 5782.54,35.2 5800.74,17 5910.74,17 6021.69,127.95 U1.3
LED_SDO_2: U2.3 U3.4 | length 382.8
  Top Layer w6: U3.4@5489.96,66.59 5489.96,32.89 5508.16,14.69 5618.16,14.69 5729.11,125.64 U2.3@5785.54,125.64
LED_SDO_3: U3.3 U4.4 | length 382.6
  Top Layer w6: U4.4@5194.84,69.59 5194.84,35.89 5213.03,17.69 5323.03,17.69 5433.99,128.64 U3.3@5490.26,128.64
LED_SDO_4: U4.3 U5.4 | length 382.5
  Top Layer w6: U5.4@4899.66,66.59 4899.66,32.89 4917.86,14.69 5027.86,14.69 5138.81,125.64 U4.3@5194.99,125.64
LED_SDO_5: U5.3 U6.4 | length 382.7
  Top Layer w6: U6.4@4604.28,66.59 4604.28,32.89 4622.48,14.69 4732.48,14.69 4843.44,125.64 U5.3@4899.81,125.64
LED_SDO_6: U6.3 U7.4 | length 382.6
  Top Layer w6: U7.4@4309.01,66.59 4309.01,32.89 4327.21,14.69 4437.21,14.69 4548.16,125.64 U6.3@4604.43,125.64
LED_SDO_7: U7.3 U8.4 | length 382.6
  Top Layer w6: U8.4@4013.73,66.59 4013.73,32.89 4031.93,14.69 4141.93,14.69 4252.88,125.64 U7.3@4309.16,125.64
LED_SDO_8: U8.3 U9.4 | length 382.6
  Top Layer w6: U9.4@3718.46,66.59 3718.46,32.89 3736.65,14.69 3846.65,14.69 3957.61,125.64 U8.3@4013.88,125.64
LED_SDO_9: U9.3 U10.4 | length 382.6
  Top Layer w6: U10.4@3423.18,66.59 3423.18,32.89 3441.38,14.69 3551.38,14.69 3662.33,125.64 U9.3@3718.61,125.64
LED_SDO_10: U10.3 U11.4 | length 382.6
  Top Layer w6: U11.4@3127.91,66.59 3127.91,32.89 3146.1,14.69 3256.1,14.69 3367.06,125.64 U10.3@3423.33,125.64
LED_SDO_11: U11.3 U12.4 | length 382.6
  Top Layer w6: U12.4@2832.63,66.59 2832.63,32.89 2850.83,14.69 2960.83,14.69 3071.78,125.64 U11.3@3128.06,125.64
LED_SDO_12: U12.3 U13.4 | length 382.6
  Top Layer w6: U13.4@2537.36,66.59 2537.36,32.89 2555.55,14.69 2665.55,14.69 2776.51,125.64 U12.3@2832.78,125.64
LED_SDO_13: U13.3 U14.4 | length 382.7
  Top Layer w6: U14.4@2242.03,66.59 2242.03,32.89 2260.22,14.69 2370.22,14.69 2481.17,125.64 U13.3@2537.51,125.64
LED_SDO_14: U14.3 U15.4 | length 382.5
  Top Layer w6: U15.4@1946.95,66.59 1946.95,32.89 1965.15,14.69 2075.15,14.69 2186.1,125.64 U14.3@2242.23,125.64
LED_SDO_15: U15.3 U16.4 | length 382.7
  Top Layer w6: U16.4@1651.43,66.59 1651.43,32.89 1669.63,14.69 1779.63,14.69 1890.58,125.64 U15.3@1946.95,125.64
LED_SDO_16: U16.3 U17.4 | length 392.7
  Top Layer w6: U17.4@1356.25,66.59 1356.25,32.89 1374.45,14.69 1484.45,14.69 1514.86,45.1 ; 1507.7,37.97 1595.37,125.64 U16.3@1651.68,125.64
LED_SDO_17: U17.3 U18.4 | length 382.6
  Top Layer w6: U18.4@1060.98,66.59 1060.98,32.89 1079.17,14.69 1189.17,14.69 1300.13,125.64 U17.3@1356.4,125.64
LED_SDO_18: U18.3 U19.4 | length 382.6
  Top Layer w6: U19.4@765.7,66.59 765.7,32.89 783.9,14.69 893.9,14.69 1004.85,125.64 U18.3@1061.13,125.64
LED_SDO_19: U19.3 U20.4 | length 382.6
  Top Layer w6: U20.4@470.43,66.59 470.43,32.89 488.63,14.69 598.63,14.69 709.58,125.64 U19.3@765.85,125.64
LED_SDO_20: U20.3 U21.4 | length 382.6
  Top Layer w6: U21.4@175.16,66.59 175.16,32.89 193.35,14.69 303.35,14.69 414.3,125.64 U20.3@470.58,125.64
pads on no net: P2.1 P3.1 U21.2 U21.3

## Polygon pours and split planes (outlines as drawn)
GND on Bottom Layer "gnd_top" (hatched 45Degree grid 30 track 9.49, remove dead copper, pour order 5): 6503.5,-478.11 ccw(c6506.02,-478.11) 6506.02,-480.63 6604.44,-480.63 ccw(c6604.44,-478.11) 6606.96,-478.11 6606.96,-152 ccw(c6604.44,-152) 6606.95,-151.79 cw(c6622.38,-150.62) 6621.1,-135.2 6702.76,-135.2 ccw(c6702.76,-113) 6724.96,-113 ccw(c6722.44,-113) 6723.97,-111 ccw(c6722.44,-109) 6724.96,-109 6724.96,171.81 ccw(c6697.4,171.81) 6697.4,199.37 0,199.37 ccw(c0,196.85) -2.52,196.85 -2.52,0 ccw(c0,0) 0,-2.52 6604.33,-2.51 ccw(c6604.33,0) 6604.33,-2.51 cw(c6604.33,-19.68) 6621.5,-19.68 6621.5,-43 cw(c6604.33,-43) 6604.33,-60.17 6524.02,-60.17 cw(c6523.67,-80.34) 6524.05,-60.17 6524.02,-60.17 ccw(c6523.67,-80.34) 6503.5,-79.95 ccw(c6506.02,-80) 6503.5,-80
GND on Top Layer "gnd_top" (hatched 45Degree grid 30 track 9.49, remove dead copper, pour order 1): 6503.5,-478.11 ccw(c6506.02,-478.11) 6506.02,-480.63 6604.44,-480.63 ccw(c6604.44,-478.11) 6606.96,-478.11 6606.96,-152 cw(c6622.49,-150.72) 6621.1,-135.2 6702.76,-135.2 ccw(c6702.76,-113) 6724.96,-113 ccw(c6722.44,-113) 6723.97,-111 ccw(c6722.44,-109) 6724.96,-109 6724.96,171.81 ccw(c6697.4,171.81) 6697.4,199.37 0,199.37 ccw(c0,196.85) -2.52,196.85 -2.52,0 ccw(c0,0) 0,-2.52 6604.33,-2.51 cw(c6604.33,-19.68) 6621.5,-19.68 6621.5,-43 cw(c6604.33,-43) 6604.33,-60.17 6524.02,-60.17 ccw(c6523.66,-80.33) 6503.5,-79.95

## Keep-outs
Keep-Out Layer:
  lines w5: 6722.44,-113 cw(c6702.76,-113) 6702.76,-132.68 6621,-132.68 ccw(c6622.38,-150.62) 6604.44,-152 6604.44,-510.11 6506.02,-510.11 6506.02,-80 cw(c6523.67,-80.33) 6524,-62.69 6604.33,-62.68 ccw(c6604.33,-43) 6624.02,-43 6624.02,-19.68 ccw(c6604.33,-19.68) 6604.33,0 ; 6722.44,-109 6722.44,171.81 ccw(c6697.4,171.81) 6697.4,196.85 6624.02,196.85 6289.37,196.85 0,196.85 0,0 6604.33,0 ; 6604.33,0 6604.33,0

## Other copper
Top Layer:
  pour cut-out: 6504.24,-511.89 6606.22,-511.89 6606.22,-336.22 6606,-336 6504.24,-336
  pour cut-out: 150.36,152.7 150.65,153 275.65,153 275.65,39 275.34,38.68 150.65,38.68 150.65,152.4
  pour cut-out: 445.62,152.7 445.91,153 570.91,153 570.91,39 570.6,38.68 445.91,38.68 445.91,152.4
  pour cut-out: 1331.31,152.7 1331.61,153 1456.61,153 1456.61,39 1456.29,38.68 1331.61,38.68 1331.61,152.4
  pour cut-out: 1035.88,152.7 1036.18,153 1161.18,153 1161.18,39 1160.86,38.68 1036.18,38.68 1036.18,152.4
  pour cut-out: 740.91,152.7 741.21,153 866.21,153 866.21,39 865.89,38.68 741.21,38.68 741.21,152.4
  pour cut-out: 2512.41,152.7 2512.71,153 2637.71,153 2637.71,39 2637.39,38.68 2512.71,38.68 2512.71,152.4
  pour cut-out: 2216.93,152.7 2217.23,153 2342.23,153 2342.23,39 2341.91,38.68 2217.23,38.68 2217.23,152.4
  pour cut-out: 1626.58,152.7 1626.88,153 1751.88,153 1751.88,39 1751.57,38.68 1626.88,38.68 1626.88,152.4
  pour cut-out: 1922.1,152.7 1922.4,153 2047.4,153 2047.4,39 2047.09,38.69 1922.4,38.69 1922.4,152.4
  pour cut-out: 3693.51,152.7 3693.81,153 3818.81,153 3818.81,39 3818.49,38.68 3693.81,38.68 3693.81,152.4
  pour cut-out: 3398.09,152.7 3398.39,153 3523.39,153 3523.39,39 3523.07,38.68 3398.39,38.68 3398.39,152.4
  pour cut-out: 2807.69,152.7 2807.98,153 2932.98,153 2932.98,39 2932.67,38.68 2807.98,38.68 2807.98,152.4
  pour cut-out: 3103.11,152.7 3103.41,153 3228.41,153 3228.41,39 3228.09,38.68 3103.41,38.68 3103.41,152.4
  pour cut-out: 4874.72,152.7 4875.02,153 5000.02,153 5000.02,39 4999.7,38.68 4875.02,38.68 4875.02,152.4
  pour cut-out: 4579.19,152.7 4579.49,153 4704.49,153 4704.49,39 4704.17,38.68 4579.49,38.68 4579.49,152.4
  pour cut-out: 3988.79,152.7 3989.09,153 4114.09,153 4114.09,39 4113.77,38.68 3989.09,38.68 3989.09,152.4
  pour cut-out: 4284.21,152.7 4284.51,153 4409.51,153 4409.51,39 4409.2,38.68 4284.51,38.68 4284.51,152.4
  pour cut-out: 5465.32,152.7 5465.61,153 5590.61,153 5590.61,39 5590.3,38.68 5465.61,38.68 5465.61,152.4
  pour cut-out: 5169.89,152.7 5170.19,153 5295.19,153 5295.19,39 5294.87,38.68 5170.19,38.68 5170.19,152.4
  pour cut-out: 5760.44,152.7 5760.74,153 5885.74,153 5885.74,39 5885.42,38.68 5760.74,38.68 5760.74,152.4
  pour cut-out: 6055.72,152.7 6056.02,153 6181.02,153 6181.02,39 6180.7,38.68 6056.02,38.68 6056.02,152.4
Bottom Layer:
  pour cut-out: 6504.24,-511.89 6606.22,-511.89 6606.22,-336.22 6606,-336 6504.24,-336

## Silkscreen, mask and mechanical layers (free items; w line width, h text height)
Mechanical 1:
  lines w5: 139,98.43 6289.37,98.43 6289.37,196.85 ; 207.74,88.93 207.74,107.93 ; 485.25,98 cw(c485.68,98) 485.68,98.43 ; 503.02,88.93 503.02,107.93 ; 6461.31,-242.91 6722.44,-242.91 ; 6461.31,-62.99 6722.44,-62.99 ; 798.29,88.93 798.29,107.93 ; 798.29,88.93 798.29,107.93 ; 798.29,88.93 798.29,107.93 ; 798.29,88.93 798.29,107.93 ; 1093.57,88.93 1093.57,107.93 ; 1093.57,88.93 1093.57,107.93 ; 1093.57,88.93 1093.57,107.93 ; 1093.57,88.93 1093.57,107.93 ; 1388.84,88.93 1388.84,107.93 ; 1388.84,88.93 1388.84,107.93 ; 1388.84,88.93 1388.84,107.93 ; 1388.84,88.93 1388.84,107.93 ; 1684.12,88.93 1684.12,107.93 ; 1684.12,88.93 1684.12,107.93 ; 1684.12,88.93 1684.12,107.93 ; 1684.12,88.93 1684.12,107.93 ; 1979.39,88.93 1979.39,107.93 ; 1979.39,88.93 1979.39,107.93 ; 1979.39,88.93 1979.39,107.93 ; 1979.39,88.93 1979.39,107.93 ; 2274.67,88.93 2274.67,107.93 ; 2274.67,88.93 2274.67,107.93 ; 2274.67,88.93 2274.67,107.93 ; 2274.67,88.93 2274.67,107.93 ; 2569.94,88.93 2569.94,107.93 ; 2569.94,88.93 2569.94,107.93 ; 2569.94,88.93 2569.94,107.93 ; 2569.94,88.93 2569.94,107.93 ; 2865.22,88.93 2865.22,107.93 ; 2865.22,88.93 2865.22,107.93 ; 2865.22,88.93 2865.22,107.93 ; 2865.22,88.93 2865.22,107.93 ; 3160.5,88.93 3160.5,107.93 ; 3160.5,88.93 3160.5,107.93 ; 3160.5,88.93 3160.5,107.93 ; 3160.5,88.93 3160.5,107.93 ; 3455.77,88.93 3455.77,107.93 ; 3455.77,88.93 3455.77,107.93 ; 3455.77,88.93 3455.77,107.93 ; 3455.77,88.93 3455.77,107.93 ; 3751.05,88.93 3751.05,107.93 ; 3751.05,88.93 3751.05,107.93 ; 3751.05,88.93 3751.05,107.93 ; 3751.05,88.93 3751.05,107.93 ; 4046.32,88.93 4046.32,107.93 ; 4046.32,88.93 4046.32,107.93 ; 4046.32,88.93 4046.32,107.93 ; 4046.32,88.93 4046.32,107.93 ; 4341.6,88.93 4341.6,107.93 ; 4341.6,88.93 4341.6,107.93 ; 4341.6,88.93 4341.6,107.93 ; 4341.6,88.93 4341.6,107.93 ; 4636.87,88.93 4636.87,107.93 ; 4636.87,88.93 4636.87,107.93 ; 4636.87,88.93 4636.87,107.93 ; 4636.87,88.93 4636.87,107.93 ; 4932.15,88.93 4932.15,107.93 ; 4932.15,88.93 4932.15,107.93 ; 4932.15,88.93 4932.15,107.93 ; 4932.15,88.93 4932.15,107.93 ; 5227.43,88.93 5227.43,107.93 ; 5227.43,88.93 5227.43,107.93 ; 5227.43,88.93 5227.43,107.93 ; 5227.43,88.93 5227.43,107.93 ; 5522.7,88.93 5522.7,107.93 ; 5522.7,88.93 5522.7,107.93 ; 5522.7,88.93 5522.7,107.93 ; 5522.7,88.93 5522.7,107.93 ; 5817.98,88.93 5817.98,107.93 ; 5817.98,88.93 5817.98,107.93 ; 5817.98,88.93 5817.98,107.93 ; 5817.98,88.93 5817.98,107.93 ; 6113.25,88.93 6113.25,107.93 ; 6113.25,88.93 6113.25,107.93 ; 6113.25,88.93 6113.25,107.93 ; 6113.25,88.93 6113.25,107.93 ; 6113.25,88.93 6113.25,107.93 ; 6113.25,88.93 6113.25,107.93 ; 6113.25,88.93 6113.25,107.93 ; 6113.25,88.93 6113.25,107.93
  text "Base PCB" at 6209,-251 h30
Mechanical 2:
  rectangle: 6506.02,-510 6604.44,-351
  lines w5: 6368,-415 6493,-415 ; 6472,-428 6493,-415 ; 6472,-402 6493,-415
  text "Stiffener Location" at 5850.65,-426 h30
Mechanical 4:
  lines w5: 6722.44,-113 cw(c6702.76,-113) 6702.76,-132.69 6621,-132.69 ccw(c6622.38,-150.62) 6604.44,-152 6604.44,-510.11 6506.02,-510.11 6506.02,-80 cw(c6523.67,-80.34) 6524,-62.69 6604.33,-62.69 ccw(c6604.33,-43) 6624.02,-43 6624.02,-19.68 ccw(c6604.33,-19.68) 6604.33,0 ; 6722.44,-109 6722.44,171.81 ccw(c6697.4,171.81) 6697.4,196.85 6624.02,196.85 6289.37,196.85 0,196.85 0,0 6604.33,0 ; 6604.33,0 6604.33,0
Drill Drawing:
  text "PWB, LED STRIP FLEX" at 7741.33,-5537.09 h157.48
  text "PWB-020218-001" at 7928.33,-5862.87 h127.95
  text "1" at 10353.53,-5921.93 h78.74
  text "1" at 10164.55,-5925.87 h78.74
Mechanical 17:
  text "NOTES: /  / 1. ALL ASSEMBLY MATERIALS TO BE RoHS COMPLIANT. /  / 2. MATERIAL: /           • FLEXIBLE METAL CLAD DIELECTRIC IAW                 /             IPC-4204/11 E1E2 O0/0 CU W7 T/T /           • STIFFENER IAW IPC-4203/1-E1E8M1 /  / 3. FINISH:  IMMERSION GOLD /  / ALL EXPOSED CONDUCTIVE PATTERN AREAS NOT COVERED WITH COVERLAY MATERIAL OR OTHER PLATING  / SHALL BE IMMERSION GOLD (0.000030-0.000090 mm) OVER ELECTROLESS NICKEL (0.001-0.006 mm). /  / 4. LEGEND SHALL BE WHITE, PERMANENT, ORGANIC, NON-CONDUCTIVE UV OR EPOXY TYPE INK APPLIED  / TO THE TOP SIDE OF THE BOARD. THERE SHALL BE NO LEGEND ON ANY SOLDERABLE COMPONENT LAND. /  / 5. ALL ASSEMBLY MATERIALS TO BE RoHS COMPLIANT. /  / 6. ANY LABELS OR COMPOSITION OF, APPLIED TO THE BOARD NEED TO BE APPROVIED BY AIRZAI /  / 7. MINIMUM TRACE WIDTHS: /           EXTERNAL: 0.152 mm  INTERNAL: N/A /  / 8. MINIMUM SPACE BETWEEN FEATURES: /          EXTERNAL: 0.15 mm  INTERNAL: N/A /  / 9. Overall Board Thickness: 0.1mm" at -20,-4431.85 h78.74
  text "PWB, LED STRIP FLEX" at 7783.95,-5611.68 h157.48
  text "PWA-020218-001" at 7977.95,-5902.68 h127.95
  text "1" at 10156.68,-5914.06 h59.06
  text "1" at 10345.66,-5914.06 h59.06
Mechanical 18:
  lines w5: -3951,-3780 -3751,-3780 ; -3951,-1405 -3751,-1405 ; -3951,970 -3751,970 ; -1451,-6155 -1451,-5955 ; -1451,3145 -1451,3345 ; 1049,-6155 1049,-5955 ; 1049,3145 1049,3345 ; 3549,-6155 3549,-5955 ; 3549,3145 3549,3345 ; 6049,-6155 6049,-5955 ; 6049,3145 6049,3345 ; 6348.2,-5657.21 10848.2,-5657.21 ; 6348.2,-5415.48 7418.87,-5415.48 ; 6348.2,-5181.43 7418.87,-5181.43 ; 6348.2,-4970.6 7418.87,-4970.6 ; 6349,-5955 10849,-5955 ; 6973.99,-5958.2 6973.99,-4758.2 ; 7418.87,-5957.21 7418.87,-4757.21 ; 7418.87,-5290.28 10848.06,-5290.28 ; 7758.83,-4757.21 10848.2,-4757.21 ; 7848.2,-4757.21 6348.2,-4757.21 ; 8549,-6155 8549,-5955 ; 8549,3145 8549,3345 ; 10471.83,-5957.21 10471.83,-5657.21 ; 10849,-4755 10849,-5955 ; 10849,-3780 11049,-3780 ; 10849,970 11049,970 ; 4948.2,-5957.21 4948.2,-4757.21 6348.2,-4757.21 ; 4948.2,-5957.21 6348.2,-5957.21 ; 4948.2,-5957.21 6348.2,-5957.21 ; 6348.2,-5957.21 6348.2,-4757.21 ; 6348.2,-5957.21 10848.2,-5957.21 ; 6348.2,-5957.21 10848.2,-5957.21 ; 10848.2,-5957.21 10848.2,-4757.21 ; 10848.2,-5957.21 10848.2,-4757.21 ; 10849,-5955 -3751,-5955 -3751,3145 10849,3145 10849,-5955 ; -3951,-6155 11049,-6155 11049,3345 -3951,3345 -3951,-6155
  text "1" at -2719.66,3215 h70
  text "2" at -224,3215 h70
  text "3" at 2265.34,3215 h70
  text "4" at 4772.01,3215 h70
  text "5" at 7271,3215 h70
  text "6" at 9776,3215 h70
  text "A" at -3876,2072 h70
  text "A" at 10924,2072 h70
  text "B" at -3876,-308 h70
  text "B" at 10924,-308 h70
  text "C" at -3876,-2683 h70
  text "C" at 10924,-2683 h70
  text "AIRZAI PROPRIETARY & CONFIDENTIAL" at 6504.12,-4646.34 h127.95
  text "DATE:" at 7004.5,-4819.42 h45
  text "ENGINEER:" at 6370.65,-4825.72 h45
  text "UNLESS OTHERWISE SPECIFIED" at 5047.81,-4886.35 h59.06
  text "02/05/19" at 7011.83,-4928.03 h59.06
  text "FD" at 6563.52,-4934.3 h78.74
  text "DIMENSIONS ARE IN MM" at 5169.86,-5012.33 h59.06
  text "PCB DESIGNER:" at 6366.71,-5034.1 h45
  text "DATE:" at 6992.69,-5035.95 h45
  text "D" at -3876,-5053 h70
  text "D" at 10924,-5053 h70
  text "AIRZAI" at 7709.83,-5091.22 h127.95
  text "TOLERANCES" at 5370.65,-5138.31 h59.06
  text "02/05/19" at 7011.83,-5142.6 h59.06
  text "DFM" at 6537.14,-5144.18 h78.74
  text "DATE:" at 6992.69,-5248.55 h45
  text "CHECK" at 6366.71,-5250.64 h45
  text "ANGULAR" at 5854.9,-5295.8 h59.06
  text "DECIMALS" at 5051.75,-5307.61 h59.06
  text "TITLE:" at 7470.66,-5354.02 h45
  text "FD" at 6602.89,-5367.37 h78.74
  text ".XX +/- .127MM" at 5004.5,-5465.09 h59.06
  text "+/-" at 5843.09,-5469.02 h59.06
  text "REL" at 6378.52,-5481.62 h45
  text "DATE:" at 7008.44,-5488.71 h45
  text "FD" at 6593.05,-5583.91 h78.74
  text ".XXX +/- .080MM" at 4992.69,-5626.5 h59.06
  text "SCALE:" at 7013.95,-5721.78 h45
  text "REV:" at 10494.27,-5720.99 h45
  text "DWG NO:" at 7465.13,-5729.65 h45
  text "SIZE" at 6378.52,-5732.8 h45
  text "B" at 6582.26,-5863.39 h120
  text "DO NOT SCALE DRAWING" at 5047.81,-5866.66 h70.87
  text "A" at 10577.94,-5882.56 h120
  text "1:1" at 7062.57,-5887.02 h120
  text "SHEET" at 9929.7,-5918.63 h45
  text "OF" at 10193.48,-5918.63 h45
  text "1" at -2719.66,-6085 h70
  text "2" at -224,-6085 h70
  text "3" at 2265.34,-6085 h70
  text "4" at 4772.01,-6085 h70
  text "5" at 7271,-6085 h70
  text "6" at 9776,-6085 h70

## Dimensions
0,196.85 to 6289.37,196.85 on Mechanical 5